# Altium PCB PCB_M2.PcbDoc
Units mil, origin at the board's own origin, x right, y up, seen from the top; angles counter-clockwise.
Board outline 3550 x 2000 mil, 2 copper layers (Top Layer, Bottom Layer); 27 components, 19 nets, 69 pads, 6 vias.
Unrouted connection lines stored in the file: 24.
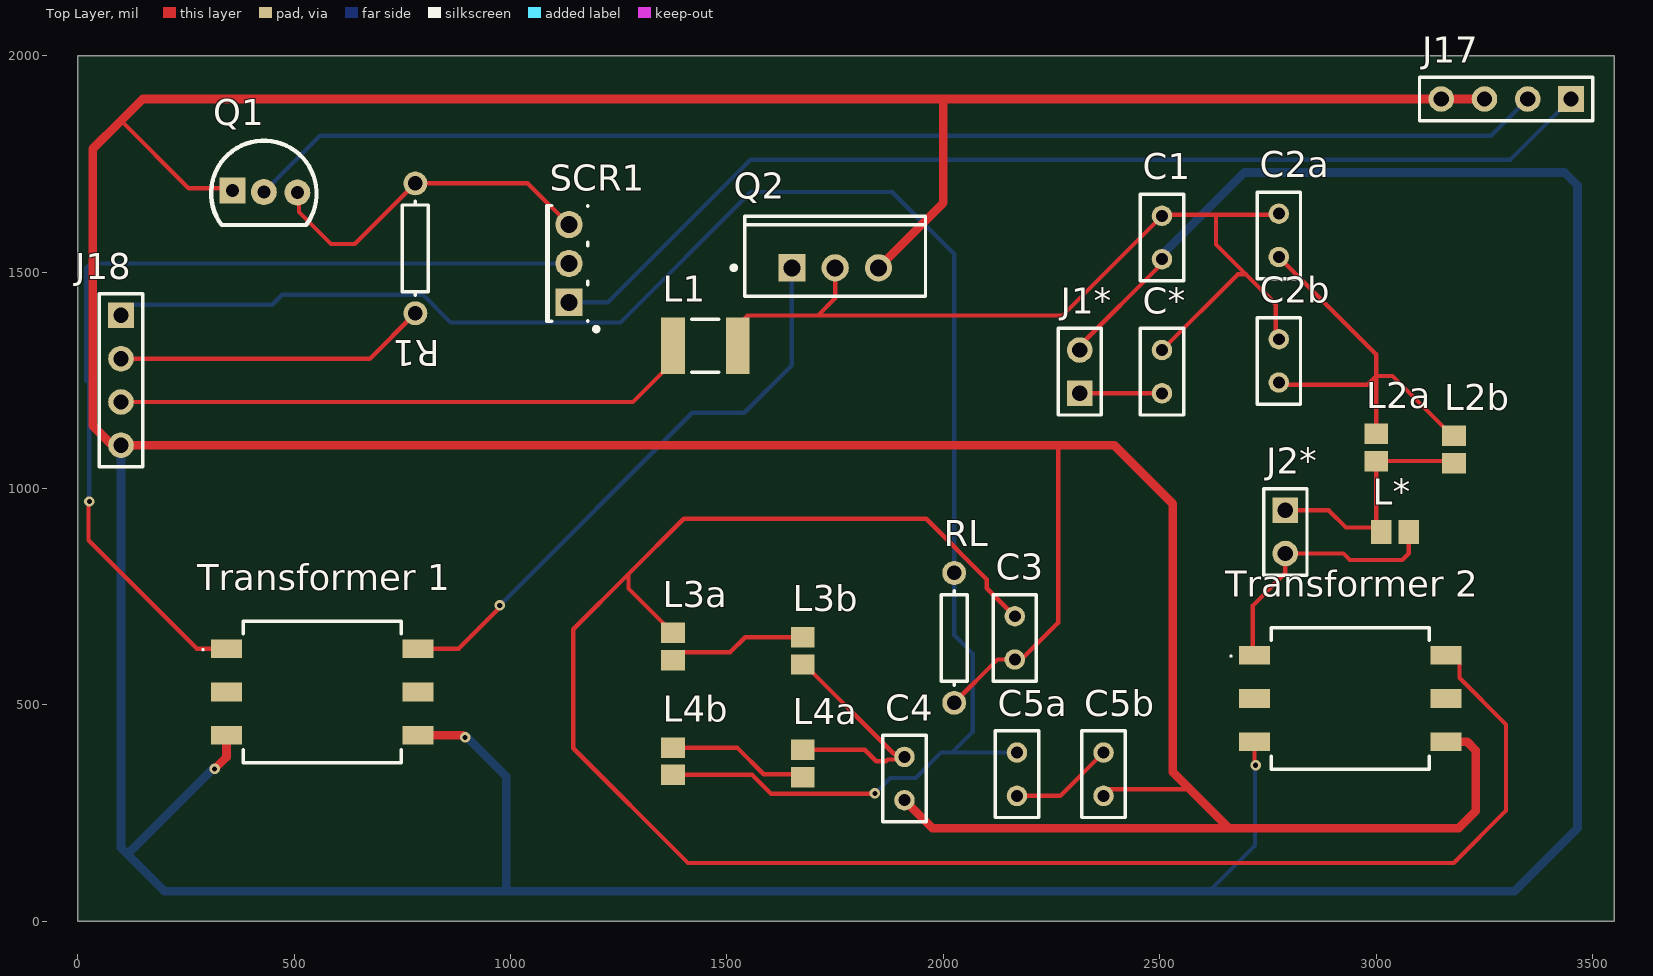
[diagram p0: Top Layer view]
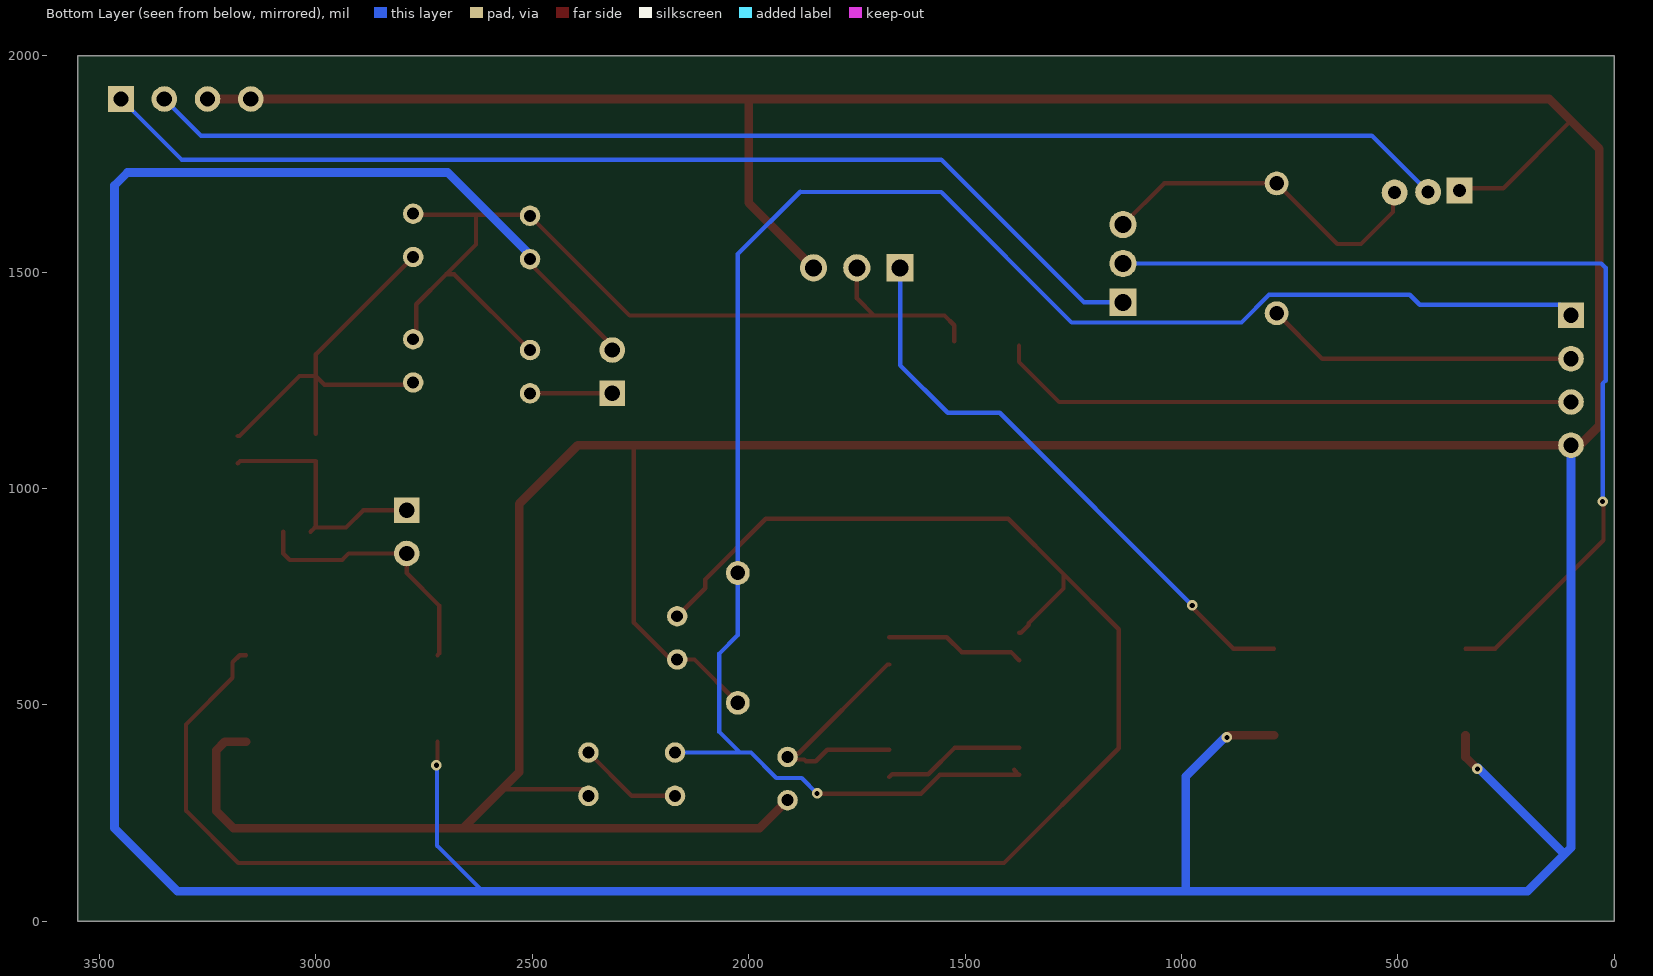
[diagram p1: Bottom Layer view, seen from below]

## Layer stack, top to bottom
Top Solder: solder mask 0.4, Solder Resist, Dk 3.5
Top Layer: signal copper 1.4
Dielectric 1: dielectric 12.6, FR-4, Dk 4.8
Bottom Layer: signal copper 1.4
Bottom Solder: solder mask 0.4, Solder Resist, Dk 3.5

## Board outline
0,0 0,2000 3550,2000 3550,0

## Design rules (kind name [scope] priority, off if disabled: settings)
Clearance [All] p1: gap=10 ignorepadtopadclearanceinfootprint=FALSE except(0: Arc-Hole Track-Hole SMDPad-Hole THPad-Hole Via-Hole Fill-Hole Poly-Hole Region-Hole Text-Hole)
HoleSize [All] p1: absolutevalues=TRUE maxlimit=900 minlimit=12 maxpercent=80.000 minpercent=20.000
MinimumSolderMaskSliver [All] p1: minsoldermaskwidth=1
PolygonConnect [All] p1: connectstyle=Relief reliefconductorwidth=10 reliefentries=4 polygonreliefangle="90 Angle" airgapwidth=10
RoutingVias [All] p1: holewidth=12 width=24 viastyle="Through Hole" minholewidth=12 minwidth=24 maxholewidth=100 maxwidth=200
SilkToSilkClearance [All] p1: silktosilkclearance=0
SilkToSolderMaskClearance [IsPad] p1: minsilkscreentomaskgap=1 clearancetoexposedcopper=TRUE
SolderMaskExpansion [All] p1: expansion=4 istentingtop=FALSE
Width [All] p1: maxlimit=200 minlimit=10 preferedwidth=10
26 further rules are at their usual default settings.

## Components (designator, comment, footprint, x,y, rotation, side; value= is the part's Value field where it differs from the comment)
C1 "Cap" RAD-0.1 2505,1580 r90 top value=100pF
C2a "Cap" RAD-0.1 2775,1585 r270 top value=5nF
C2b "Cap" RAD-0.1 2775,1295 r270 top value=1.2nF
C3 "Cap" RAD-0.1 2165,655 r90 top value=150PF
C4 "Cap" RAD-0.1 1910,330 r90 top value=360PF
C5a "Cap" RAD-0.1 2170,340 r90 top value=360PF
C5b "Cap" RAD-0.1 2370,340 r90 top value=430PF
C* "Cap" RAD-0.1 2505,1270 r90 top value=100pF
J1* "Header 2" HDR1X2 2315,1220 r90 top
J2* "Header 2" HDR1X2 2790,950 r270 top
J17 "Header 4" HDR1X4 3450,1900 r180 top
J18 "Header 4" HDR1X4 100,1400 r270 top
L1 "Inductor" INDC4532 1450,1330 r180 top value=1mH
L2a "Inductor" 2029 3000,1095 r270 top value=150nH
L2b "Inductor" 2029 3180,1090 r270 top value=820nH
L3a "Inductor" 2029 1375,635 r270 top value=750nH
L3b "Inductor" 2029 1675,625 r270 top value=180nH
L4a "Inductor" 2029 1675,365 r270 top value=180nH
L4b "Inductor" 2029 1375,370 r270 top value=200nH
L* "Inductor" 2029 3043.5,900 r180 top value=820nH
Q1 "MOSFET-N" Transistor 432.5,1608.75 r0 top
Q2 "IRF520NPBF" INTR-TO-220AB-3 1750,1510 r90 top
R1 "Res1" AXIAL-0.3 780,1555 r270 top value=1M
RL "Res1" AXIAL-0.3 2025,655 r90 top value=50
SCR1 "Triac" 369-03 1135,1520 r90 top
"Transformer 1" "Comment" 78931812515 565,530 r0 top
"Transformer 2" "Comment" 78931812515 2940,515 r0 top

## Footprints (in the part's own frame and the unit in brackets; to place one, negate y for a bottom-side part, rotate by r counter-clockwise, add the part's x,y. Pads: shape width x height; smd on the part's side, far side on the other; paste and mask are expansions set on the pad)
369-03 [mm] "TO, Thru-Hole, Vertical, Heatsink Mounted; 3 In-Line Leads; Pitch 2.28 mm"
  rect 1.6x1.6 hole 1: 1(-2.28,0)
  round 1.6 hole 1: 2(0,0) 3(2.28,0)
  silkscreen extent -3.97,-1.73 3.4,1.3, body extent -3.45,-1.15 3.45,1.35, height 9.7
2029 [mm] "Chip Inductor, Body 2.0x1.2mm, IPC High Density"
  rect 1.2x1.4 smd: 1(-0.8,0) 2(0.8,0)
  body extent -1.1,-0.7 1.1,0.7, height 0.55
78931812515 [mm] "Power Inductor 4-Leads, SMD, Body 6.0 x 6.0mm"
  rect 1.83x1.09 smd: 1(-5.62,2.54) 2(-5.62,0) 3(-5.62,-2.54) 4(5.62,-2.54) 5(5.62,0) 6(5.62,2.54)
  silkscreen extent -7.05,-4.15 4.62,4.15
AXIAL-0.3 [mm] "Axial Device, Thru-Hole; 2 Leads; 0.3 in Pin Spacing"
  round 1.4 hole 0.85: 1(-3.81,0) 2(3.81,0)
  silkscreen extent -2.77,-0.76 2.77,0.76
HDR1X2 [mm] "Connector; Header; 2 Position"
  rect 1.5x1.5 hole 0.9: 1(0,0)
  round 1.5 hole 0.9: 2(2.54,0)
  silkscreen extent -1.27,-1.27 3.81,1.27
HDR1X4 [mm] "Connector; Header; 4 Position"
  rect 1.5x1.5 hole 0.9: 1(0,0)
  round 1.5 hole 0.9: 2(2.54,0) 3(5.08,0) 4(7.62,0)
  silkscreen extent -1.27,-1.27 8.89,1.27
INDC4532 [mm] "Chip Inductor, Body 4.5x3.2mm, IPC High Density"
  rect 1.4x3.3 smd: 1(-1.9,0) 2(1.9,0)
  silkscreen extent -0.8,-1.55 0.8,1.55, body extent -2.4,-1.7 2.4,1.7, height 0.55
INTR-TO-220AB-3 [mm] "FM, 3-Leads, Body 10.55x4.7mm, Pitch 2.54mm"
  rect 1.6x1.6 hole 1: 1(0,2.54)
  round 1.6 hole 1: 2(0,0) 3(0,-2.54)
  silkscreen extent -1.67,-5.3 3.03,6.07, body extent -1.67,-5.28 3.03,5.28, height 19.3
RAD-0.1 [mm] "Radial Cap, Thru-Hole; 2 Leads; 0.1 in Pin Spacing"
  round 1.2 hole 0.7: 1(-1.27,0) 2(1.27,0)
  silkscreen extent -2.54,-1.27 2.54,1.27
Transistor [mil] "TO, 3-Leads, Body Dia 4.7mm, Pitch 1.27mm"
  round 60 hole 30: 1(75,75) 2(-2.5,76.25)
  rect 60x60 hole 30: 3(-75,80)
  silkscreen extent -124,0 119,195

## Part data
C1 C2a C2b C3 C*: library part "CAP ALUM 1.5UF 20% 50V RADIAL", "Ceramic Capacitor, Multilayer, Ceramic, 200V, 10% +Tol, 10% -Tol, X7R, 15% TC, 0.00015uF, Through Hole Mount", Capacitor Type=Ceramic, Case/Package=1510, Manufacturer=KEMET, Manufacturer Part Number=EEA-GA1H1R5H, Max Operating Temperature=125°C, Min Operating Temperature=-55°C, Package Shape=Rectangular, Package Style=RadialMeter, Rated DC Voltage (URdc)=200V, Supplier Part Number=C317C151K2R5TA, Temperature Characteristics Code=X7R, Tolerance  (fill in as +-)=10%, Voltage Rating=50V, Category="Ceramic Capacitors", ComponentLink1Description=https://datasheet.ciiva.com:443/pdfs/VipMasterIC/IC/KEME/KEME-S-A0009782347/KEME-S-A0009782347-1.pdf?src-supplier=IHS+Markit, ComponentLink1URL=https://datasheet.ciiva.com:443/pdfs/VipMasterIC/IC/KEME/KEME-S-A0009782347/KEME-S-A0009782347-1.pdf?src-supplier=IHS+Markit, ComponentLink2Description=https://datasheet.ciiva.com/5388/f3101-goldmax-5388710.pdf?src-supplier=Mouser, ComponentLink2URL=https://datasheet.ciiva.com/5388/f3101-goldmax-5388710.pdf?src-supplier=Mouser, Dielectric Material=Ceramic, Height=5.84mm, JESD-609 Code=e3, LatestRevisionDate=17-Jul-2002, LatestRevisionNote="Re-released for DXP Platform.", Length=3.81mm, Mounting Technology="Through Hole", Multilayer=Yes, Packaging=Bulk, Pins=2, Pricing="1=0.08040, 500=0.06280 (USD)", Published=8-Jun-2000, Publisher="Altium Limited", Reach SVHC Compliant=Yes, RoHS=Yes, RoHS Compliant=Yes, Stock=1515, Supplier="Arrow Electronics", Terminal Finish=Nickel, Terminal Pitch=5.08mm, Termination=Wire, Tolerance (fill in as +-)=10%, Width=2.54mm
C4 C5a C5b: library part "CAP CER 330PF 50V X7R RADIAL", "Capacitor", Manufacturer Part Number=K331K15X7RF53L2, Voltage Rating=50V, LatestRevisionDate=17-Jul-2002, LatestRevisionNote="Re-released for DXP Platform.", Published=8-Jun-2000, Publisher="Altium Limited"
J1* J2*: "Header, 2-Pin", LatestRevisionDate=17-Jul-2002, LatestRevisionNote="Re-released for DXP Platform.", Publisher="Altium Limited"
J17 J18: "Header, 4-Pin", LatestRevisionDate=17-Jul-2002, LatestRevisionNote="Re-released for DXP Platform.", Publisher="Altium Limited"
Q1: "N-Channel MOSFET", LatestRevisionDate=17-Jul-2002, LatestRevisionNote="Re-released for DXP Platform.", PackageDescription="TO, Flat Index; 3 In-Line, Axial Leads; Body Dia. 4.6mm; Lead Dia. 0.5 mm (max)", PackageReference=E3, PackageVersion=1995/1996, Published=8-Jun-2000, Publisher="Altium Limited"
Q2: library part CMP-2100-03647-1, "HEXFET(R) Power MOSFET, 100 V, 9.7 A, 0.2 Ohm, -55 to 175 degC, 3-Pin FM (TO-220AB), RoHS, Tube", Case/Package=TO-220AB, Continuous Drain Current (ID)=9.7A, Drain to Source Breakdown Voltage=100V, Drain to Source Resistance=200mOhm, Gate to Source Voltage (Vgs)=20V, Input Capacitance=330pF, Manufacturer="International Rectifier", Max Operating Temperature=175degC, Max Power Dissipation=48W, Min Operating Temperature=-55degC, Package Description="3-Pin Flange Mount, Body 4.445 x 10.415 mm, Pitch 2.54 mm", Package Quantity=50, Current Rating=9.7A, Datasheet URL=http://www.infineon.com/dgdl/irf520npbf.pdf?fileId=5546d462533600a4015355e340711985, Datasheet Version=37926.0, Drain to Source Voltage (Vdss)=100V, Element Configuration=Single, Fall Time=23ns, Height=15.24mm, Lead Free=LeadFree, Lead Pitch=2.54mm, Length=10.54mm, Manufacturer URL=http://internationalrectifier.com/, Mount=ThroughHole, Number of Elements=1, Number of Pins=3, Package Reference=TO-220AB, Packaging=Rail/Tube, Power Dissipation=48W, Radiation Hardening=No, Rds On Max=200mOhm, REACH SVHC=NoSVHC, Rise Time=23ns, RoHSCompliant=true, Turn-Off Delay Time=32ns, Turn-On Delay Time=4.5ns, Voltage Rating (DC)=100V, Width=4.69mm
R1 RL: library part "RES 150 OHM 5% 1/4W AXIAL", "Resistor", Manufacturer Part Number=CFR-25JB-52-150R, Power Rating=1/4W, Tolerance=0.05, LatestRevisionDate=17-Jul-2002, LatestRevisionNote="Re-released for DXP Platform.", Published=8-Jun-2000, Publisher="Altium Limited"
SCR1: "Silicon Bidirectional Triode Thyristor", Supplier Part Number 1=497-10407-5-ND, ComponentLink1Description="Manufacturer Link", ComponentLink1URL=http://www.motorola.com/, DatasheetVersion=1999, LatestRevisionDate=17-Jul-2002, LatestRevisionNote="Re-released for DXP Platform.", Note="Pin 2 is electrically connected to Pin 4 (TAB)", PackageDescription="TO, Thru-Hole, Vertical, Heatsink Mounted; 3 In-Line Leads; Pitch 2.28 mm", PackageReference=369-03, Published=29-Sep-2000, Publisher="Altium Limited", Supplier 1=Digi-Key
"Transformer 1": library part CMP-1384-00003-1, "Energy Harvesting Coupled Inductor,SMD, WE-EHPI, L=25.0 µH", Inductance="25.0 ÂµH", Manufacturer="Wuerth Elektronik", PartNumber=74488540250, ComponentLink1Description="Manufacturer URL", ComponentLink1URL=http://www.we-online.com, ComponentLink2Description=Datasheet, ComponentLink2URL=http://katalog.we-online.de/pbs/datasheet/74488540250.pdf, PackageReference="WE-EHPI 5838"
"Transformer 2": library part 78931812515, "WE-PSPA Push Pull & Gate Drive Transformer NEW", Manufacturer_Name="Wurth Elektronik", Datasheet Link=https://www.we-online.com/components/products/datasheet/78931812515.pdf, Geometry.Height=4.1mm, Manufacturer_Part_Number=78931812515
L1 L2a L2b L3a L3b L4a L4b L*: Code_IEC=1005, Code_JEITA=0402, LatestRevisionDate=29-May-2009, LatestRevisionNote="IPC-7351 Footprint Added.", PackageDescription="Chip Inductor", PackageReference=0402-A, Published=8-Jun-2000, Publisher="Altium Limited"

## Via types
v1: diameter 24, hole 12, Top Layer to Bottom Layer, 6 vias

## Nets (pads, with @x,y where several pads share a name; then routed paths per layer and width w, separated by ;. In a path a pad name is that pad's centre, name@x,y a point inside that pad or via, vN(x,y) a via of type N, cw(c..) or ccw(c..) an arc to the next point about the centre after c; other vN are vias at no path point)
GND: "Transformer 1.3" "Transformer 1.4" "Transformer 2.3" "Transformer 2.4" C1.1 C3.1 C4.1 C5b.1 J1*.2 J17.3 J17.4 J18.4 Q1.3 Q2.3 RL.1 | length 19055.7
  Top Layer w10: J18.4@80,1100 J18.4 ; 100,1850 256.25,1693.75 352.5,1693.75 Q1.3 ; v1@890,430 v1(895,425) ; RL.1 2125,605 C3.1 2180,605 2265,690 2265,1095 ; J1*.2 2315,1330 2505,1520 C1.1 ; C5b.1 2385,305 2570,305 ; 2718.74,415 2718.74,363.14 v1(2721.32,360.56)
  Top Layer w20: J18.4@80,1100 35,1145 35,1785 100,1850 150,1900 2000,1900 ; J18.4 2395,1100 2530,965 2530,345 2570,305 2660,215 ; v1(316.28,352.21) 343.74,379.67 343.74,430 ; 786.26,430 v1@890,430 ; Q2.3 2000,1660 2000,1900 ; C4.1 1975,215 2660,215 ; 3161.26,415 3210,415 3230,395 3230,255 3190,215 2660,215 ; J17.3 J17.4 2000,1900
  Bottom Layer w10: v1(895,425) v1@900,425 ; C1.1 C1.1@2505,1540 ; 2615,70 2720,175 v1@2720,360.56
  Bottom Layer w20: J18.4 100,170 115,155 ; v1@314.24,354.24 115,155 ; v1@900,425 990,335 990,75 ; C1.1@2505,1540 2695,1730 3435,1730 3465,1700 3465,215 3320,70 200,70 115,155
NetC1_2: C1.2 C2a.1 C2b.1 C*.2 L1.1 Q2.2 | length 2139.8
  Top Layer w10: L1.1@1524.8,1340 1524.8,1377.4 1547.36,1399.96 1710,1399.96 ; Q2.2 1750,1439.96 1710,1399.96 ; C*.2 2679.85,1494.85 2698.94,1494.85 ; C2b.1@2775,1340 2767.87,1347.13 2767.87,1425.92 2698.94,1494.85 ; C2a.1 2772.5,1632.5 2630,1632.5 ; 1710,1399.96 2274.96,1399.96 C1.2 2507.5,1632.5 2630,1632.5 ; 2630,1632.5 2630,1563.79 2698.94,1494.85
NetC2a_2: C2a.2 C2b.2 L2a.1 L2b.1 | length 972.4
  Top Layer w10: C2b.2@2775,1240 2980,1240 3000,1260 ; C2a.2 3000,1310 3000,1260 ; L2a.1 3000,1260 ; L2b.1 3176.06,1121.5 3037.56,1260 3000,1260
NetC3_2: "Transformer 2.6" C3.2 L3a.1 | length 4426.4
  Top Layer w10: L3a.1 1371.06,666.5 1352.44,685.12 1352.44,689.06 1272.5,769 1272.5,802.5 ; C3.2 2100.25,769.75 2100.25,789.94 1960.19,930 1400,930 1272.5,802.5 ; 3161.26,615 3175.83,615 3192.28,598.54 3192.28,562.67 3300,454.95 3300,255.86 3179.14,135 1410,135 1145,400 1145,675 1272.5,802.5
NetC4_2: C4.2 L3b.2 L4a.1 | length 573.6
  Top Layer w10: L4a.1 1818.5,396.5 1845,370 1867.46,370 1871.38,373.92 1903.92,373.92 C4.2 1902.87,387.13 1885.31,387.13 1678.94,593.5 L3b.2
NetC5a_1: C5a.1 C5b.2 | length 241.4
  Top Layer w10: C5a.1 2270,290 C5b.2
NetC5a_2: C5a.2 J18.1 L4b.2 RL.2 | length 4213.8
  Top Layer w10: L4b.2@1386.5,350 L4b.2 1558.21,338.5 1601.83,294.88 1840.91,294.88 v1(1841.74,295.71)
  Bottom Layer w10: J18.1 124.53,1424.53 449.56,1424.53 472.59,1447.56 797.63,1447.56 861.45,1383.74 1253.74,1383.74 1555,1685 1880,1685 1880.86,1685.86 2025,1541.72 RL.2 2025,661.36 2067.56,618.8 2067.56,437.56 2020,390 ; v1(1841.74,295.71) 1877.41,331.38 1936,331.38 1994.62,390 2020,390 ; C5a.2 2020,390
NetC*_1: C*.1 J1*.1 | length 190
  Top Layer w10: J1*.1 C*.1
NetJ2*_1: J2*.1 L2a.2 L2b.2 L*.2 | length 579.1
  Top Layer w10: J2*.1 2890,950 2930,910 L*.2@3002.01,910 ; L*.2 L*.2@3002.01,910 ; L2b.2 3175,1063.5 L2a.2 3000,912.01 L*.2@3002.01,910
NetJ2*_2: "Transformer 2.1" J2*.2 L*.1 | length 615
  Top Layer w10: 2718.74,615 2715,618.74 2715,730 2790,805 J2*.2 2924.14,850 2939.14,835 3060,835 3075,850 L*.1
NetJ17_1: J17.1 SCR1.1 | length 2509.6
  Bottom Layer w10: SCR1.1 1225.24,1430.24 1555,1760 3310,1760 J17.1
NetJ17_2: J17.2 Q1.2 | length 3009.1
  Bottom Layer w10: Q1.2 560,1815 3265,1815 J17.2
NetJ18_2: J18.2 R1.2 | length 723.5
  Top Layer w10: J18.2 675,1300 R1.2
NetJ18_3: J18.3 L1.2 | length 1351
  Top Layer w10: J18.3 1282.6,1200 1375.2,1292.6 L1.2
NetL3a_2: L3a.2 L3b.1 | length 322
  Top Layer w10: L3a.2 1393.62,622.13 1507.82,622.13 1542.19,656.5 L3b.1
NetL4a_2: L4a.2 L4b.1 | length 328.2
  Top Layer w10: L4b.1 1523.5,401.5 1585,340 1668.5,340 L4a.2
NetQ1_1: Q1.1 R1.1 SCR1.3 | length 798.3
  Top Layer w10: Q1.1 511.25,1680 511.25,1638.75 585,1565 640,1565 R1.1 1039.76,1705 SCR1.3
NetQ2_1: "Transformer 1.6" Q2.1 | length 1363
  Top Layer w10: 786.26,630 880,630 975,725 v1(975,730)
  Bottom Layer w10: v1(975,730) 1420,1175 1540,1175 1650,1285 Q2.1
NetSCR1_2: "Transformer 1.1" SCR1.2 | length 2174.9
  Top Layer w10: v1(27,970) 25,968 25,880.4 275.4,630 343.74,630
  Bottom Layer w10: v1(27,970) 27,1242.39 20,1249.39 20,1510 30,1520 1045,1520 SCR1.2
pads on no net: "Transformer 1.2" "Transformer 1.5" "Transformer 2.2" "Transformer 2.5"

## Dimensions
100,1400 to 0,2000 on Dimension
3450,1900 to 3550,2000 on Dimension
100,1100 to 0,0 on Dimension
100,1100 to 0,0 on Mechanical 16